# Altium PCB 400631.PcbDoc (part 2 of 8)
Units mm, origin at the board's own origin, x right, y up, seen from the top; angles counter-clockwise.
Board outline 136.53 x 63.5 mm, 4 copper layers (Top Layer, Mid-Layer 1, Mid-Layer 2, Bottom Layer), stack 1.52 mm thick; 366 components, 256 nets, 1485 pads, 1968 vias.
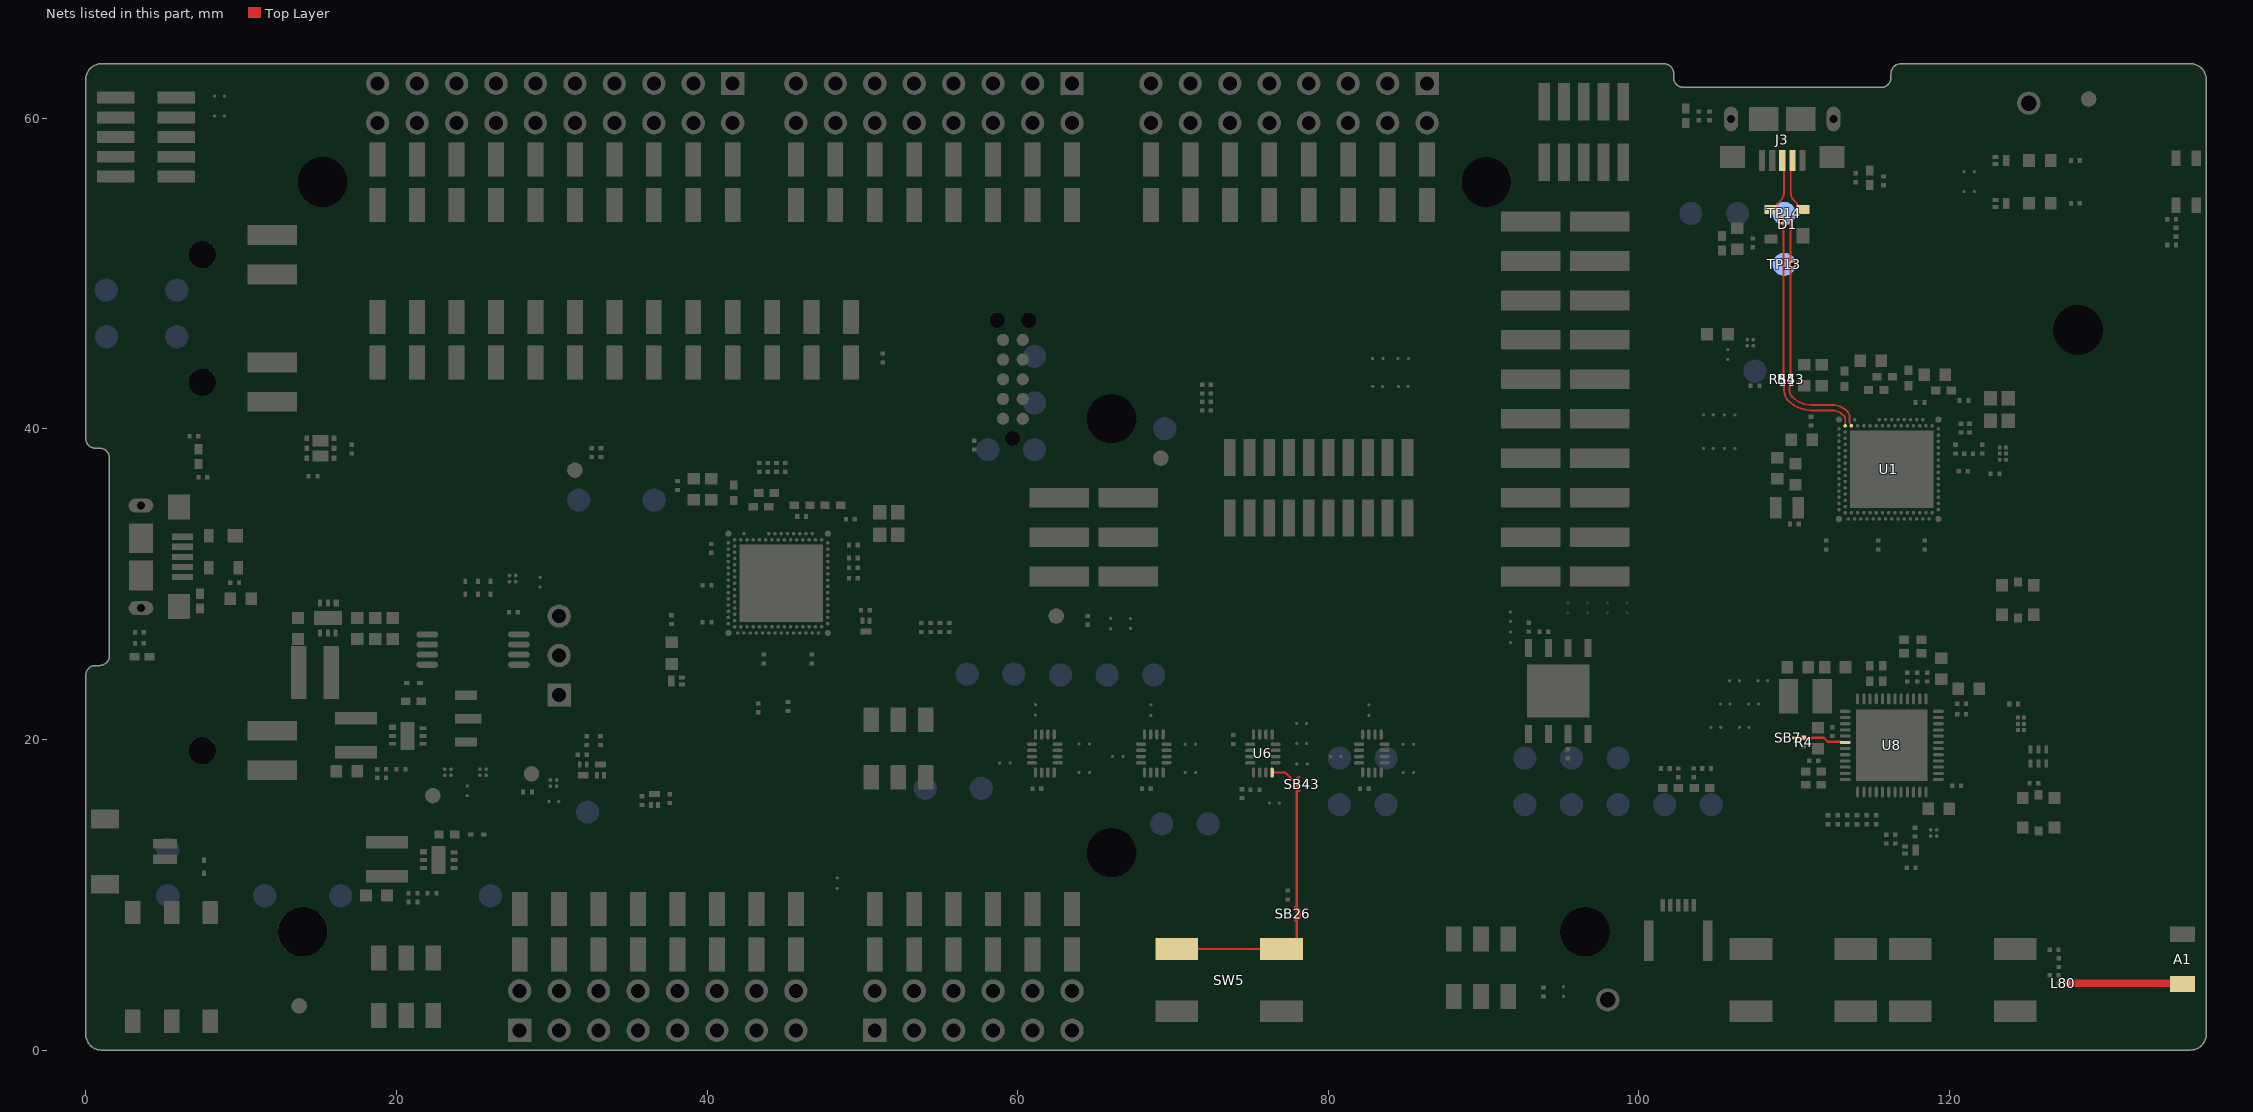
[diagram p4: the nets of this part, all layers, seen from the top]

## Footprints (in the part's own frame and the unit in brackets; to place one, negate y for a bottom-side part, rotate by r counter-clockwise, add the part's x,y. Pads: shape width x height; smd on the part's side, far side on the other; paste and mask are expansions set on the pad) (continued)
SOCKET_1x8_SMD [mm] "Socket, 2.54mm, SMD"
  rect 1.02x2.19 smd: 1(0,-1.465) 1(0,1.465) 2(2.54,-1.465) 2(2.54,1.465) 3(5.08,-1.465) 3(5.08,1.465) 4(7.62,-1.465) 4(7.62,1.465) 5(10.16,-1.465) 5(10.16,1.465) 6(12.7,1.465) 6(12.7,-1.465) 7(15.24,-1.465) 7(15.24,1.465) 8(17.78,-1.465) 8(17.78,1.465)
  silkscreen extent -1.27,-1.27 19.05,1.27, body extent -1.27,-2.29 19.05,2.29, height 7.47
SOCKET_1x10_SMD [mm] "Socket, 2.54mm, SMD"
  rect 1.02x2.19 smd: 1(0,1.465) 1(0,-1.465) 2(2.54,-1.465) 2(2.54,1.465) 3(5.08,-1.465) 3(5.08,1.465) 4(7.62,-1.465) 4(7.62,1.465) 5(10.16,-1.465) 5(10.16,1.465) 6(12.7,-1.465) 6(12.7,1.465) 7(15.24,-1.465) 7(15.24,1.465) 8(17.78,-1.465) 8(17.78,1.465) 9(20.32,-1.465) 9(20.32,1.465) 10(22.86,-1.465) 10(22.86,1.465)
  silkscreen extent -1.27,-1.27 24.13,1.27, body extent -1.27,-2.29 24.13,2.29, height 7.47
SOCKET_2x3_SMD-2.54mm-bottom-NC [mm] "Socket, 2.54mm, SMD"
  rect 1.02x2.22 smd far side: 1(-2.54,-2.825) 2(-2.54,2.825) 3(0,-2.825) 4(0,2.825) 5(2.54,-2.825) 6(2.54,2.825)
SOCKET_2x10_SMD-2.54mm [mil] "CONN HEADER VERT DUAL 20POS SMD - FEMALE HEADER, PCB, 0.1\", 10+10WAY"
  rect 50x150 smd: 1(-450,-87.5) 2(-450,87.5) 3(-350,-87.5) 4(-350,87.5) 5(-250,-87.5) 6(-250,87.5) 7(-150,-87.5) 8(-150,87.5) 9(-50,-87.5) 10(-50,87.5) 11(50,-87.5) 12(50,87.5) 13(150,-87.5) 14(150,87.5) 15(250,-87.5) 16(250,87.5) 17(350,-87.5) 18(350,87.5) 19(450,-87.5) 20(450,87.5)
  silkscreen extent -510,-140 500,100, body extent -500,-138 500,139, height 290
SODFL100X40-2N [mm] "SODFL, 2-Leads, Body 0.60x1.00mm, IPC Medium Density"
  rect 0.36x0.25 smd: 1(-0.42,0) 2(0.42,0)
  silkscreen extent -0.7,-0.35 0.5,0.5, body extent -0.5,-0.33 0.5,0.33, height 0.4
Solderbridge#1 [mm]
  round 0.2 smd paste-10: 1(-0.312,0) 2(0.312,0)
  Top Layer region: 0.077,0.432 0.152,0.505 0.271,0.467 0.335,0.424 0.409,0.351 0.462,0.292 0.521,0.193 0.549,0.099 0.544,-0.122 0.518,-0.193 0.434,-0.33 0.351,-0.411 0.259,-0.469 0.157,-0.5 0.107,-0.483 0.077,-0.43
  Top Layer region: -0.077,-0.432 -0.152,-0.505 -0.271,-0.467 -0.335,-0.424 -0.409,-0.351 -0.462,-0.292 -0.521,-0.193 -0.549,-0.099 -0.544,0.122 -0.518,0.193 -0.434,0.33 -0.351,0.411 -0.259,0.469 -0.157,0.5 -0.107,0.483 -0.077,0.43
  Top Layer lines w0.152: 0.153,0.431 cw(c0.042,0) 0.461,-0.149 cw(c0.042,0) 0.153,-0.431 ; -0.153,0.431 ccw(c-0.042,0) -0.153,-0.431
Solderbridge#2 [mm]
  round 0.2 smd paste-10: 1(-0.312,0) 2(0.312,0)
  Top Layer region: 0.077,0.432 0.152,0.505 0.271,0.467 0.335,0.424 0.409,0.351 0.462,0.292 0.521,0.193 0.549,0.099 0.544,-0.122 0.518,-0.193 0.434,-0.33 0.351,-0.411 0.259,-0.469 0.157,-0.5 0.107,-0.483 0.077,-0.43
  Top Layer region: -0.077,-0.432 -0.152,-0.505 -0.271,-0.467 -0.335,-0.424 -0.409,-0.351 -0.462,-0.292 -0.521,-0.193 -0.549,-0.099 -0.544,0.122 -0.518,0.193 -0.434,0.33 -0.351,0.411 -0.259,0.469 -0.157,0.5 -0.107,0.483 -0.077,0.43
  Top Layer lines w0.152: 0.153,0.431 cw(c0.042,0) 0.153,-0.431 ; -0.153,0.431 ccw(c-0.042,0) -0.153,-0.431
Solderbridge#3 [mm]
  round 0.2 smd paste-10: 1(-0.312,0) 2(0.312,0)
  Top Layer region: 0.077,0.432 0.152,0.505 0.271,0.467 0.335,0.424 0.409,0.351 0.462,0.292 0.521,0.193 0.549,0.099 0.544,-0.122 0.518,-0.193 0.434,-0.33 0.351,-0.411 0.259,-0.469 0.157,-0.5 0.107,-0.483 0.077,-0.43
  Top Layer region: -0.077,-0.432 -0.152,-0.505 -0.271,-0.467 -0.335,-0.424 -0.409,-0.351 -0.462,-0.292 -0.521,-0.193 -0.549,-0.099 -0.544,0.122 -0.518,0.193 -0.434,0.33 -0.351,0.411 -0.259,0.469 -0.157,0.5 -0.107,0.483 -0.077,0.43
  Top Layer lines w0.152: 0.153,-0.431 ccw(c0.042,0) 0.487,0 ccw(c0.042,0) 0.325,0.343 ccw(c0.042,0) 0.153,0.431 ; -0.153,-0.431 cw(c-0.042,0) -0.487,0 cw(c-0.042,0) -0.153,0.431
Solderbridge#4 [mm]
  round 0.2 smd paste-10: 1(-0.312,0) 2(0.312,0)
  Top Layer region: 0.077,0.432 0.152,0.505 0.271,0.467 0.335,0.424 0.409,0.351 0.462,0.292 0.521,0.193 0.549,0.099 0.544,-0.122 0.518,-0.193 0.434,-0.33 0.351,-0.411 0.259,-0.469 0.157,-0.5 0.107,-0.483 0.077,-0.43
  Top Layer region: -0.077,-0.432 -0.152,-0.505 -0.271,-0.467 -0.335,-0.424 -0.409,-0.351 -0.462,-0.292 -0.521,-0.193 -0.549,-0.099 -0.544,0.122 -0.518,0.193 -0.434,0.33 -0.351,0.411 -0.259,0.469 -0.157,0.5 -0.107,0.483 -0.077,0.43
  Top Layer lines w0.152: -0.153,-0.431 cw(c-0.042,0) -0.288,-0.371 cw(c-0.042,0) -0.312,-0.353 cw(c-0.042,0) -0.487,0 cw(c-0.042,0) -0.153,0.431 ; 0.153,-0.431 ccw(c0.042,0) 0.487,0 ccw(c0.042,0) 0.153,0.431
Solderbridge#5 [mm]
  round 0.2 smd paste-10: 1(-0.312,0) 2(0.312,0)
  Top Layer region: 0.077,0.432 0.152,0.505 0.271,0.467 0.335,0.424 0.409,0.351 0.462,0.292 0.521,0.193 0.549,0.099 0.544,-0.122 0.518,-0.193 0.434,-0.33 0.351,-0.411 0.259,-0.469 0.157,-0.5 0.107,-0.483 0.077,-0.43
  Top Layer region: -0.077,-0.432 -0.152,-0.505 -0.271,-0.467 -0.335,-0.424 -0.409,-0.351 -0.462,-0.292 -0.521,-0.193 -0.549,-0.099 -0.544,0.122 -0.518,0.193 -0.434,0.33 -0.351,0.411 -0.259,0.469 -0.157,0.5 -0.107,0.483 -0.077,0.43
  Top Layer lines w0.152: -0.153,-0.431 cw(c-0.042,0) -0.312,-0.353 cw(c-0.042,0) -0.365,-0.306 cw(c-0.042,0) -0.478,-0.087 cw(c-0.042,0) -0.48,-0.078 cw(c-0.042,0) -0.487,0 cw(c-0.042,0) -0.153,0.431 ; 0.153,-0.431 ccw(c0.042,0) 0.153,0.431
Solderbridge#6 [mm]
  round 0.2 smd paste-10: 1(-0.312,0) 2(0.312,0)
  Top Layer region: 0.077,0.432 0.152,0.505 0.271,0.467 0.335,0.424 0.409,0.351 0.462,0.292 0.521,0.193 0.549,0.099 0.544,-0.122 0.518,-0.193 0.434,-0.33 0.351,-0.411 0.259,-0.469 0.157,-0.5 0.107,-0.483 0.077,-0.43
  Top Layer region: -0.077,-0.432 -0.152,-0.505 -0.271,-0.467 -0.335,-0.424 -0.409,-0.351 -0.462,-0.292 -0.521,-0.193 -0.549,-0.099 -0.544,0.122 -0.518,0.193 -0.434,0.33 -0.351,0.411 -0.259,0.469 -0.157,0.5 -0.107,0.483 -0.077,0.43
  Top Layer lines w0.152: 0.153,0.431 cw(c0.042,0) 0.338,0.332 cw(c0.042,0) 0.338,-0.332 cw(c0.042,0) 0.312,-0.353 cw(c0.042,0) 0.153,-0.431 ; -0.153,0.431 ccw(c-0.042,0) -0.487,0 ccw(c-0.042,0) -0.486,-0.025 ccw(c-0.042,0) -0.153,-0.431
Solderbridge#7 [mm]
  round 0.2 smd paste-10: 1(-0.312,0) 2(0.312,0)
  Top Layer region: -0.077,-0.432 -0.152,-0.505 -0.271,-0.467 -0.335,-0.424 -0.409,-0.351 -0.462,-0.292 -0.521,-0.193 -0.549,-0.099 -0.544,0.122 -0.518,0.193 -0.434,0.33 -0.351,0.411 -0.259,0.469 -0.157,0.5 -0.107,0.483 -0.077,0.43
  Top Layer region: 0.077,0.432 0.152,0.505 0.271,0.467 0.335,0.424 0.409,0.351 0.462,0.292 0.521,0.193 0.549,0.099 0.544,-0.122 0.518,-0.193 0.434,-0.33 0.351,-0.411 0.259,-0.469 0.157,-0.5 0.107,-0.483 0.077,-0.43
  Top Layer lines w0.152: 0.153,0.431 cw(c0.042,0) 0.487,0 cw(c0.042,0) 0.153,-0.431 ; -0.153,0.431 ccw(c-0.042,0) -0.225,0.405 ccw(c-0.042,0) -0.312,0.353 ccw(c-0.042,0) -0.396,0.269 ccw(c-0.042,0) -0.487,0 ccw(c-0.042,0) -0.312,-0.353 ccw(c-0.042,0) -0.225,-0.405 ccw(c-0.042,0) -0.153,-0.431
Solderbridge#8 [mm]
  round 0.2 smd paste-10: 1(-0.312,0) 2(0.312,0)
  Top Layer region: 0.077,0.432 0.152,0.505 0.271,0.467 0.335,0.424 0.409,0.351 0.462,0.292 0.521,0.193 0.549,0.099 0.544,-0.122 0.518,-0.193 0.434,-0.33 0.351,-0.411 0.259,-0.469 0.157,-0.5 0.107,-0.483 0.077,-0.43
  Top Layer region: -0.077,-0.432 -0.152,-0.505 -0.271,-0.467 -0.335,-0.424 -0.409,-0.351 -0.462,-0.292 -0.521,-0.193 -0.549,-0.099 -0.544,0.122 -0.518,0.193 -0.434,0.33 -0.351,0.411 -0.259,0.469 -0.157,0.5 -0.107,0.483 -0.077,0.43
  Top Layer lines w0.152: 0.153,0.431 cw(c0.042,0) 0.486,-0.036 cw(c0.042,0) 0.312,-0.353 cw(c0.042,0) 0.153,-0.431 ; -0.153,0.431 ccw(c-0.042,0) -0.2,0.416 ccw(c-0.042,0) -0.307,0.357 ccw(c-0.042,0) -0.312,0.353 ccw(c-0.042,0) -0.461,0.149 ccw(c-0.042,0) -0.487,0 ccw(c-0.042,0) -0.312,-0.353 ccw(c-0.042,0) -0.3,-0.362 ccw(c-0.042,0) -0.274,-0.38 ccw(c-0.042,0) -0.2,-0.416 ccw(c-0.042,0) -0.153,-0.431
Solderbridge#9 [mm]
  round 0.2 smd paste-10: 1(-0.312,0) 2(0.312,0)
  Top Layer region: -0.077,-0.432 -0.152,-0.505 -0.271,-0.467 -0.335,-0.424 -0.409,-0.351 -0.462,-0.292 -0.521,-0.193 -0.549,-0.099 -0.544,0.122 -0.518,0.193 -0.434,0.33 -0.351,0.411 -0.259,0.469 -0.157,0.5 -0.107,0.483 -0.077,0.43
  Top Layer region: 0.077,0.432 0.152,0.505 0.271,0.467 0.335,0.424 0.409,0.351 0.462,0.292 0.521,0.193 0.549,0.099 0.544,-0.122 0.518,-0.193 0.434,-0.33 0.351,-0.411 0.259,-0.469 0.157,-0.5 0.107,-0.483 0.077,-0.43
  Top Layer lines w0.152: 0.153,0.431 cw(c0.042,0) 0.487,0 cw(c0.042,0) 0.461,-0.149 cw(c0.042,0) 0.153,-0.431 ; -0.153,0.431 ccw(c-0.042,0) -0.277,0.377 ccw(c-0.042,0) -0.312,0.353 ccw(c-0.042,0) -0.487,0 ccw(c-0.042,0) -0.312,-0.353 ccw(c-0.042,0) -0.153,-0.431
Solderbridge#10 [mm]
  round 0.2 smd paste-10: 1(-0.312,0) 2(0.312,0)
  Top Layer region: 0.077,0.432 0.152,0.505 0.271,0.467 0.335,0.424 0.409,0.351 0.462,0.292 0.521,0.193 0.549,0.099 0.544,-0.122 0.518,-0.193 0.434,-0.33 0.351,-0.411 0.259,-0.469 0.157,-0.5 0.107,-0.483 0.077,-0.43
  Top Layer region: -0.077,-0.432 -0.152,-0.505 -0.271,-0.467 -0.335,-0.424 -0.409,-0.351 -0.462,-0.292 -0.521,-0.193 -0.549,-0.099 -0.544,0.122 -0.518,0.193 -0.434,0.33 -0.351,0.411 -0.259,0.469 -0.157,0.5 -0.107,0.483 -0.077,0.43
  Top Layer lines w0.152: 0.153,0.431 cw(c0.042,0) 0.153,-0.431 ; -0.153,0.431 ccw(c-0.042,0) -0.461,0.149 ccw(c-0.042,0) -0.203,-0.414 ccw(c-0.042,0) -0.153,-0.431
Solderbridge#11 [mm]
  round 0.2 smd paste-10: 1(-0.312,0) 2(0.312,0)
  Top Layer region: 0.077,0.432 0.152,0.505 0.271,0.467 0.335,0.424 0.409,0.351 0.462,0.292 0.521,0.193 0.549,0.099 0.544,-0.122 0.518,-0.193 0.434,-0.33 0.351,-0.411 0.259,-0.469 0.157,-0.5 0.107,-0.483 0.077,-0.43
  Top Layer region: -0.077,-0.432 -0.152,-0.505 -0.271,-0.467 -0.335,-0.424 -0.409,-0.351 -0.462,-0.292 -0.521,-0.193 -0.549,-0.099 -0.544,0.122 -0.518,0.193 -0.434,0.33 -0.351,0.411 -0.259,0.469 -0.157,0.5 -0.107,0.483 -0.077,0.43
  Top Layer lines w0.152: -0.153,0.431 ccw(c-0.042,0) -0.487,0 ccw(c-0.042,0) -0.312,-0.353 ccw(c-0.042,0) -0.153,-0.431 ; 0.153,0.431 cw(c0.042,0) 0.457,0.16 cw(c0.042,0) 0.487,-0.015 cw(c0.042,0) 0.486,-0.025 cw(c0.042,0) 0.457,-0.16 cw(c0.042,0) 0.407,-0.254 cw(c0.042,0) 0.33,-0.339 cw(c0.042,0) 0.153,-0.431
Solderbridge_Shorted#1 [mm]
  round 0.2 smd paste-10: 1(-0.338,0) 2(0.338,0)
  Top Layer region: -0.102,-0.432 -0.178,-0.505 -0.296,-0.467 -0.361,-0.424 -0.434,-0.351 -0.488,-0.292 -0.546,-0.193 -0.574,-0.099 -0.569,0.122 -0.544,0.193 -0.46,0.33 -0.376,0.411 -0.284,0.469 -0.183,0.5 -0.132,0.483 -0.102,0.43
  Top Layer region: 0.102,0.432 0.178,0.505 0.296,0.467 0.361,0.424 0.434,0.351 0.488,0.292 0.546,0.193 0.574,0.099 0.569,-0.122 0.544,-0.193 0.46,-0.33 0.376,-0.411 0.284,-0.469 0.183,-0.5 0.132,-0.483 0.102,-0.43
  Top Layer lines w0.152: 0.178,0.431 cw(c0.068,0) 0.178,-0.431 ; -0.178,0.431 ccw(c-0.068,0) -0.178,-0.431
  Top Layer lines w0.203: 0.338,0 -0.338,0
Solderbridge_Shorted#2 [mm]
  round 0.2 smd paste-10: 1(-0.338,0) 2(0.338,0)
  Top Layer region: 0.102,0.432 0.178,0.505 0.296,0.467 0.361,0.424 0.434,0.351 0.488,0.292 0.546,0.193 0.574,0.099 0.569,-0.122 0.544,-0.193 0.46,-0.33 0.376,-0.411 0.284,-0.469 0.183,-0.5 0.132,-0.483 0.102,-0.43
  Top Layer region: -0.102,-0.432 -0.178,-0.505 -0.296,-0.467 -0.361,-0.424 -0.434,-0.351 -0.488,-0.292 -0.546,-0.193 -0.574,-0.099 -0.569,0.122 -0.544,0.193 -0.46,0.33 -0.376,0.411 -0.284,0.469 -0.183,0.5 -0.132,0.483 -0.102,0.43
  Top Layer lines w0.152: 0.178,0.431 cw(c0.068,0) 0.512,0 cw(c0.068,0) 0.512,-0.005 cw(c0.068,0) 0.503,-0.092 cw(c0.068,0) 0.178,-0.431 ; -0.178,0.431 ccw(c-0.068,0) -0.178,-0.431
  Top Layer lines w0.203: 0.338,0 -0.338,0
Solderbridge_Shorted#3 [mm]
  round 0.2 smd paste-10: 1(-0.338,0) 2(0.338,0)
  Top Layer region: 0.102,0.432 0.178,0.505 0.296,0.467 0.361,0.424 0.434,0.351 0.488,0.292 0.546,0.193 0.574,0.099 0.569,-0.122 0.544,-0.193 0.46,-0.33 0.376,-0.411 0.284,-0.469 0.183,-0.5 0.132,-0.483 0.102,-0.43
  Top Layer region: -0.102,-0.432 -0.178,-0.505 -0.296,-0.467 -0.361,-0.424 -0.434,-0.351 -0.488,-0.292 -0.546,-0.193 -0.574,-0.099 -0.569,0.122 -0.544,0.193 -0.46,0.33 -0.376,0.411 -0.284,0.469 -0.183,0.5 -0.132,0.483 -0.102,0.43
  Top Layer lines w0.152: 0.178,0.431 cw(c0.068,0) 0.512,-0.006 cw(c0.068,0) 0.487,-0.149 cw(c0.068,0) 0.178,-0.431 ; -0.178,0.431 ccw(c-0.068,0) -0.178,-0.431
  Top Layer lines w0.203: 0.338,0 -0.338,0
Solderbridge_Shorted#4 [mm]
  round 0.2 smd paste-10: 1(-0.338,0) 2(0.338,0)
  Top Layer region: 0.102,0.432 0.178,0.505 0.296,0.467 0.361,0.424 0.434,0.351 0.488,0.292 0.546,0.193 0.574,0.099 0.569,-0.122 0.544,-0.193 0.46,-0.33 0.376,-0.411 0.284,-0.469 0.183,-0.5 0.132,-0.483 0.102,-0.43
  Top Layer region: -0.102,-0.432 -0.178,-0.505 -0.296,-0.467 -0.361,-0.424 -0.434,-0.351 -0.488,-0.292 -0.546,-0.193 -0.574,-0.099 -0.569,0.122 -0.544,0.193 -0.46,0.33 -0.376,0.411 -0.284,0.469 -0.183,0.5 -0.132,0.483 -0.102,0.43
  Top Layer lines w0.152: -0.178,-0.431 cw(c-0.068,0) -0.178,0.431 ; 0.178,-0.431 ccw(c0.068,0) 0.512,0 ccw(c0.068,0) 0.178,0.431
  Top Layer lines w0.203: -0.338,0 0.338,0
SON127P600X80_HS-9N [mm] "SON, 8-Leads, Body 5.00x6.00mm, Pitch 1.27mm, Thermal Pad 4.00x3.40mm, IPC Medium Density"
  rect 1.15x0.45 smd: 1(-2.77,1.905) 2(-2.77,0.635) 3(-2.77,-0.635) 4(-2.77,-1.905) 5(2.77,-1.905) 6(2.77,-0.635) 7(2.77,0.635) 8(2.77,1.905)
  rect 3.4x4 smd paste-1.7: 9(0,0)
  silkscreen extent -3.97,-2.6 3.1,2.67, body extent -3.05,-2.55 3.05,2.55, height 0.8
SOT89-150P409X160-3N [mm] "SOT89, 3-Leads, Body 4.50x2.45mm, Pitch 1.50mm, Lead Span 4.1mm, IPC Medium Density"
  rect 1.4x0.6 smd: 1(-1.8,1.5) 3(-1.8,-1.5)
  rect 1.7x0.6 smd: 2(-1.65,0)
  Top Layer region: -1.016,-0.3 -0.635,-0.3 -0.635,0.3 -1.016,0.3
  Top Layer region: -0.8,0.3 -0.15,0.95 1.85,0.95 2.5,0.3 2.5,-0.3 1.85,-0.95 -0.15,-0.95 -0.8,-0.3
  silkscreen extent -2.05,-2.3 1.32,2.47, body extent -2.2,-2.3 1.93,2.3, height 1.6
SOT190P230X110-4L [mm] "SOT143, 4-Leads, Body 3.0x2.5mm (max), Pitch 1.90mm, IPC High Density"
  rect 0.85x1 smd: 1(-1.025,0.75)
  rect 0.85x0.6 smd: 2(-1.025,-0.95) 3(1.025,-0.95) 4(1.025,0.95)
  silkscreen extent -1.15,-1.5 0.7,1.92, body extent -1.21,-1.46 1.21,1.46, height 1
Switch-PB-6.2x6.3mm-SMD [mm] "6.2×6.5mm TACT Switch, without ground connector"
  rect 2.75x1.4 smd: 1(-3.375,2) 1(3.375,2) 2(-3.375,-2) 2(3.375,-2)
  silkscreen extent -3,-3 3,3, body extent -3.6,-3.1 3.6,3.1, height 2.5
TC2050-IDC-NLFP [mil]
  round 39 hole 39 unplated mask+3: 0(-150,0) 0(150,-40) 0(150,40)
  round 31 smd paste-196.85: 1(-100,-25) 2(-50,-25) 3(0,-25) 4(50,-25) 5(100,-25) 6(100,25) 7(50,25) 8(0,25) 9(-50,25) 10(-100,25)
  Top Layer pour cut-out: -100,25 -100,-25 100,-25 100,25
TESTPAD-TH [mm]
  round 1.5 hole 1: 1(0,0)
  silkscreen extent -1,-1 1,1
TP_SMD_D1.0mm [mm] "Test point - pad 1.0mm"
  round 1 smd paste-5: 1(0,0)
  silkscreen extent -0.76,-0.76 0.76,0.76
TP_SMD_D1.5mm [mm] "Test point - pad 1.5mm"
  round 1.5 smd paste-5: 1(0,0)
  body extent -0.75,-0.75 0.75,0.75, height 0.05
TSNP-6-8 [mm] "LGA, 6-Leads, Body 0,70x1,10mmx0,38mm, Pitch 0,40mm"
  rect 0.25x0.25 smd paste-0.03 mask+0.08: 1(-0.2,0.4) 2(-0.2,0) 3(-0.2,-0.4) 4(0.2,-0.4) 5(0.2,0) 6(0.2,0.4)
  silkscreen extent -0.6,-0.8 0.6,0.8, body extent -0.38,-0.58 0.38,0.58, height 0.38
TSOP65P640X120-8N [mm] "TSOP, 8-Leads, Body 3.00x4.40mm, Pitch 0.65mm, IPC Medium Density"
  oval 1.4x0.4 smd: 1(-2.95,0.975) 2(-2.95,0.325) 3(-2.95,-0.325) 4(-2.95,-0.975) 5(2.95,-0.975) 6(2.95,-0.325) 7(2.95,0.325) 8(2.95,0.975)
  silkscreen extent -3.07,-1.55 1.85,1.87, body extent -3.2,-1.55 3.2,1.55, height 1.2
TY-NR3015 [mm] "Molded Inductor, 2-Leads, Body 3.00x3.00mm, IPC Medium Density"
  rect 0.8x2.7 smd: 1(-1.1,0) 2(1.1,0)
  silkscreen extent -2.05,-1.55 1.55,1.75, body extent -1.5,-1.5 1.5,1.5, height 1.35
USB-Micro-B-RA-SMD-PiP [mm] "Micro USB B SMT"
  rect 1.35x0.4 smd mask+0.075: 1(0,1.3) 2(0,0.65) 3(0,0) 4(0,-0.65) 5(0,-1.3)
  oval 1.6x0.9 hole 0.5 slot 1.2 at 0 deg: 6(-2.675,-3.3) 6(-2.675,3.3)
  oval 2x1.5 on Top Paste: 6(-2.675,-3.3) 6(-2.675,3.3)
  rect 1.55x1.9 smd: 6(-2.675,-1.2) 6(-2.675,1.2)
  rect 1.4x1.6 smd: 6(-0.225,-3.2) 6(-0.225,3.2)
  silkscreen extent -4.75,-3.75 0.25,3.75, body extent -5.28,-4.1 0.15,4.1, height 2.72
USP-6C [mm] "DFN, 6-Leads, Body 2.00x1.80mm, Pitch 0.50mm, Thermal Pad 1.00x1.40mm, IPC Medium Density"
  rect 0.45x0.35 smd paste-0.05 mask+0.075: 1(-0.975,0.55)
  rect 0.45x0.25 smd paste-0.05 mask+0.075: 2(-0.975,0) 3(-0.975,-0.5) 4(0.975,-0.5) 5(0.975,0) 6(0.975,0.5)
  rect 0.9x1.8 smd paste-2: 7(0,0)
  Top Layer region: -0.5,-0.8 0.5,-0.8 0.5,0.8 -0.5,0.8
  silkscreen extent -1.42,-1.07 0.97,1.12, body extent -0.93,-1.02 0.93,1.02, height 0.6
VLS3012HBX [mm] "4.7µH Shielded Wirewound Inductor 2.23A 201 mOhm Max Nonstandard"
  rect 1x3.4 smd: 1(-1.05,0) 2(1.05,0)
  silkscreen extent -0.37,-1.55 0.38,1.55, body extent -1.53,-1.51 1.53,1.51, height 1.2
XQFN40P180X260X50-16N [mm] "QFN, 16-Leads, Body 1.80x2.60mm, Pitch 0.40mm, IPC Medium Density"
  oval 0.65x0.22 smd paste-0.02 mask+0.04: 1(-0.825,0.6) 2(-0.825,0.2) 3(-0.825,-0.2) 4(-0.825,-0.6) 9(0.825,-0.6) 10(0.825,-0.2) 11(0.825,0.2) 12(0.825,0.6)
  oval 0.22x0.65 smd paste-0.02 mask+0.04: 5(-0.6,-1.225) 6(-0.2,-1.225) 7(0.2,-1.225) 8(0.6,-1.225) 13(0.6,1.225) 14(0.2,1.225) 15(-0.2,1.225) 16(-0.6,1.225)
  silkscreen extent -1.45,-1.4 1,1.4, body extent -0.91,-1.31 0.91,1.31, height 0.55
XTAL_2012 [mm] "XTAL SMD 2.0 x 1.2 mm"
  rect 0.75x1.4 smd: 1(-0.725,0) 2(0.725,0)
  silkscreen extent -0.24,-0.6 0.24,0.6, body extent -1,-0.61 1,0.61, height 0.6

## Part data
A1: "2.4, 5, and 6GHz BT/WiFi6E Mini Antenna, Single-feed, Tri-band, Corner Mount", Manufacturer="Johanson Technology", Part number IPS=N.A., Part number NEMS=100700074, Supplier Part Number 1=712-2450AD18A6050ETR-ND, Artikkelnr Noca=N.A., Author=hany, Component Class=Antennas, Component Status=Active, ComponentLink1Description=Datasheet, ComponentLink1URL=https://www.johansontechnology.com/datasheets/2450AD18A6050/2450AD18A6050.pdf, ComponentLink2Description="Supplier link", ComponentLink2URL=N.A., Footprint Doc=2450AD18A6050, HelpURL=N.A., LatestRevisionDate=2022-01-21, Manufacturer Part Number=2450AD18A6050, Note=N.A., Pad Count=2, Part Number=2450AD18A6050, Part number Norautron=N.A., PartId=100700074, Published=2022-01-21, Supplier 1=Digi-Key, Supplier 2=Mouser, Supplier Part Number 2=609-2450AD18A6050
A2: library part "Johanson 2450AT18D0100_STD-R", "2.45 GHz chip antenna", Manufacturer="Johanson Technology", Part number IPS=00000001415, Part number NEMS=100700005, Part number Norautron=N.A., Supplier Part Number 1=2450AT18D0100E, Artikkelnr Noca=53059035, Author=rsk, Component Class=Antennas, Component Status=Active, ComponentLink1Description=Datasheet, ComponentLink1URL=N.A., ComponentLink2Description="Supplier link", ComponentLink2URL=N.A., Footprint Doc=2450AT18D0100, HelpURL=http://www.johansontechnology.com/datasheets/antennas/2450AT18D0100.pdf, LatestRevisionDate=2016-06-02, Manufacturer Part Number=2450AT18D0100, Note=N.A., Pad Count=4, Part Number="Johanson 2450AT18D0100_STD-R", PartId=100700005, Published=2016-01-12, Supplier 1=Digi-Key, Supplier 2=Mouser, Supplier Part Number 2=609-2450AT18D0100E
C1: library part C0201-0.7p-HQ-Murata, "Capacitor, Ceramic, NP0, ±0.1pF, 25V", Manufacturer=Murata, Manufacturer Part Number=GJM0335C1ER70BB01D, Part number IPS=N.A., Part number NEMS=100200441, Part number Norautron=26470001, Supplier Part Number 1=490-8076-1-ND, Artikkelnr Noca=N.A., Author=rsk, Component Class=Capacitors, Component Status=Active, ComponentLink1Description=Datasheet, ComponentLink1URL=https://search.murata.co.jp/Ceramy/image/img/A01X/G101/ENG/GJM0335C1ER70BB01-01.pdf, ComponentLink2Description="Supplier link", ComponentLink2URL=https://www.murata.com/en-eu/products/productdetail?partno=GJM0335C1ER70BB01%23, Footprint Doc=0201, HelpURL=https://www.digikey.no/product-detail/en/murata-electronics/GJM0335C1ER70BB01D/490-8076-1-ND/4380362, LatestRevisionDate=2020-10-13, Note=25V, Pad Count=2, Part Number=C0201-0.7p-HQ-Murata, PartId=100200441, Published=2020-03-05, Supplier 1=Digi-Key, Supplier 2=N.A., Supplier Part Number 2=N.A.
C2 C3 C5 C7 C16 C25 C26 C38 C39 C74: library part C0402-1µ0-6.3V-X5R-5%, "Capacitor, X5R, ±5%, 6.3V", Manufacturer=N.A., Part number IPS="00000007786, 00000003457", Part number NEMS=100200190, Supplier Part Number 1=1276-1444-1-ND, Artikkelnr Noca=20039235, Author=rsk, Component Class=Capacitors, Component Status=Active, ComponentLink1Description=Datasheet, ComponentLink1URL=N.A., ComponentLink2Description="Supplier link", ComponentLink2URL=N.A., Footprint Doc=0402, HelpURL=N.A., LatestRevisionDate=2021-07-22, Manufacturer Part Number=N.A., Note=6.3V, Pad Count=2, Part Number=C0402-1µ0-6.3V-X5R-5%, Part number Norautron=N.A., PartId=100200190, Published=2009-05-08, Supplier 1=Digi-Key, Supplier 2=N.A., Supplier Part Number 2=N.A.
C4 C27: library part C0201-2n2, "Capacitor, X7R, ±10%, 10V", Manufacturer=N.A., Part number IPS=00000001778, Part number NEMS=100200060, Part number Norautron=26470002, Artikkelnr Noca=N.A., Author=rsk, Component Class=Capacitors, Component Status=Active, ComponentLink1Description=Datasheet, ComponentLink1URL=N.A., ComponentLink2Description="Supplier link", ComponentLink2URL=N.A., Footprint Doc=0201, HelpURL=N.A., LatestRevisionDate=2014-11-13, Manufacturer Part Number=N.A., Note=10V, Pad Count=2, Part Number=C0201-2n2, PartId=100200060, Published=2014-11-13, Supplier 1=N.A., Supplier 2=N.A., Supplier Part Number 1=N.A., Supplier Part Number 2=N.A.
C6 C8 C9 C10 C11 C12 C13 C14 C15 C24 C30 C31 C32 C33 C34 C35 C36 C37 C41 C42 C45 C48 C50 C52 C54 C55 C56 C65 C73 C92: library part C0201-100n, "Capacitor, X5R, ±10%", Manufacturer=N.A., Part number IPS="00000001248, 00000002505", Part number NEMS=100200078, Part number Norautron=262071862, Artikkelnr Noca=N.A., Author=rsk, Component Class=Capacitors, Component Status=Active, ComponentLink1Description=Datasheet, ComponentLink1URL=N.A., ComponentLink2Description="Supplier link", ComponentLink2URL=N.A., Footprint Doc=0201, HelpURL=N.A., LatestRevisionDate=2017-11-09, Manufacturer Part Number=N.A., Note=16V, Pad Count=2, Part Number=C0201-100n, PartId=100200078, Published=2014-11-13, Supplier 1=N.A., Supplier 2=N.A., Supplier Part Number 1=N.A., Supplier Part Number 2=N.A.
C17 C18 C20 C40: library part C0603-4µ7-10V-X7S, "Capacitor, X7S, ±10%, 10V", Manufacturer=N.A., Part number IPS=00000001779, Part number NEMS=100200351, Supplier Part Number 1=445-14258-1-ND, Artikkelnr Noca=20030013, Author=rsk, Component Class=Capacitors, Component Status=Active, ComponentLink1Description=Datasheet, ComponentLink1URL=N.A., ComponentLink2Description="Supplier link", ComponentLink2URL=N.A., Footprint Doc=0603, HelpURL=N.A., LatestRevisionDate=2016-08-15, Manufacturer Part Number=N.A., Note=10V, Pad Count=2, Part Number=C0603-4µ7-10V-X7S, Part number Norautron=N.A., PartId=100200351, Published=2016-08-15, Supplier 1=Digi-Key, Supplier 2=N.A., Supplier Part Number 2=N.A.
C19: library part C0603-2µ2-6.3V-X7R, "Capacitor, X7R, ±10%", Manufacturer=N.A., Part number NEMS=100200272, Artikkelnr Noca=20039322, Author=rsk, Component Class=Capacitors, Component Status=Active, ComponentLink1Description=Datasheet, ComponentLink1URL=N.A., ComponentLink2Description="Supplier link", ComponentLink2URL=N.A., Footprint Doc=0603, HelpURL=N.A., LatestRevisionDate=2021-07-22, Manufacturer Part Number=N.A., Note=6.3V, Pad Count=2, Part Number=C0603-2µ2-6.3V-X7R, Part number IPS=N.A., Part number Norautron=N.A., PartId=100200272, Published=2009-05-08, Supplier 1=N.A., Supplier 2=N.A., Supplier Part Number 1=N.A., Supplier Part Number 2=N.A.
C21 C23 C28 C29 C46 C89 C90 C94: library part C0201-N.C., "Not mounted", Manufacturer=N.A., Part number NEMS=100200001, Artikkelnr Noca=N.A., Assembly="Not mounted", Author=rsk, Component Class=Capacitors, Component Status=Active, ComponentLink1Description=Datasheet, ComponentLink1URL=N.A., ComponentLink2Description="Supplier link", ComponentLink2URL=N.A., Footprint Doc=0201, HelpURL=N.A., LatestRevisionDate=2014-11-13, Manufacturer Part Number=N.A., Note="Chip Cap", Pad Count=2, Part Number=C0201-N.C., Part number IPS=N.A., Part number Norautron=N.A., PartId=100200001, Published=2014-11-13, Supplier 1=N.A., Supplier 2=N.A., Supplier Part Number 1=N.A., Supplier Part Number 2=N.A.
C22 C47 C49: library part C0201-10n, "Capacitor, X7R, ±10%", Manufacturer=N.A., Part number IPS=00000003480, Part number NEMS=100200067, Part number Norautron=26621779, Artikkelnr Noca=N.A., Author=rsk, Component Class=Capacitors, Component Status=Active, ComponentLink1Description=Datasheet, ComponentLink1URL=N.A., ComponentLink2Description="Supplier link", ComponentLink2URL=N.A., Footprint Doc=0201, HelpURL=N.A., LatestRevisionDate=2017-11-09, Manufacturer Part Number=N.A., Note=10V, Pad Count=2, Part Number=C0201-10n, PartId=100200067, Published=2014-11-13, Supplier 1=N.A., Supplier 2=N.A., Supplier Part Number 1=N.A., Supplier Part Number 2=N.A.
C43 C44: library part C0402-300p, "Capacitor, C0G, ±5%, 50V", Manufacturer=N.A., Part number IPS=00000007788, Part number NEMS=100200155, Supplier Part Number 1=490-3234-1-ND, Artikkelnr Noca=20020004, Author=rsk, Component Class=Capacitors, Component Status=Active, ComponentLink1Description=Datasheet, ComponentLink1URL=N.A., ComponentLink2Description="Supplier link", ComponentLink2URL=N.A., Footprint Doc=0402, HelpURL=N.A., LatestRevisionDate=2020-10-13, Manufacturer Part Number=N.A., Note=50V, Pad Count=2, Part Number=C0402-300p, Part number Norautron=N.A., PartId=100200155, Published=2015-05-29, Supplier 1=Digi-Key, Supplier 2=N.A., Supplier Part Number 2=N.A.
C51 C53 C67: library part C0603-1µ0, "Capacitor, X7R, ±10%", Manufacturer=N.A., Part number IPS=00000000616, Part number NEMS=100200271, Part number Norautron=262083409, Artikkelnr Noca=20039282, Author=rsk, Component Class=Capacitors, Component Status=Active, ComponentLink1Description=Datasheet, ComponentLink1URL=N.A., ComponentLink2Description="Supplier link", ComponentLink2URL=N.A., Footprint Doc=0603, HelpURL=N.A., LatestRevisionDate=2013-06-05, Manufacturer Part Number=N.A., Note=16V, Pad Count=2, Part Number=C0603-1µ0, PartId=100200271, Published=2009-05-08, Supplier 1=N.A., Supplier 2=N.A., Supplier Part Number 1=N.A., Supplier Part Number 2=N.A.
C57 C59 C60 C93: library part C0603-10µ-25V-X5R-CL10A106MA8NRNC, "Capacitor, X5R, ±20%, 25V", Manufacturer="Samsung Electro-Mechanics America", Manufacturer Part Number=CL10A106MA8NRNC, Part number IPS=00000009948, Part number NEMS=100200354, Part number Norautron=N.A., Supplier Part Number 1=1276-1869-1-ND, Artikkelnr Noca=20039436, Author=rsk, Component Class=Capacitors, Component Status=Active, ComponentLink1Description=Datasheet, ComponentLink1URL=N.A., ComponentLink2Description="Supplier link", ComponentLink2URL=N.A., Footprint Doc=0603, HelpURL=http://www.samsungsem.com/kr/front/downloadcms.do?path=/kr/support/product-search/mlcc/__icsFiles/afieldfile/2014/11/05&fileName=S_CL10A106MA8NRNC.pdf, LatestRevisionDate=2021-07-21, Note=25V, Pad Count=2, Part Number=C0603-10µ-25V-X5R-CL10A106MA8NRNC, PartId=100200354, Published=2015-04-10, Supplier 1=Digi-Key, Supplier 2=N.A., Supplier Part Number 2=N.A.
C58: library part C0402-1µ0-16V-X6S-GRM155C81C105KE11, "Capacitor, Ceramic, 1.0µF 16V X6S 0402,±10%", Manufacturer=Murata, Manufacturer Part Number=GRM155C81C105KE11, Part number IPS=N.A., Part number NEMS=100200493, Supplier Part Number 1=81-GRM155C81C105KE1J, Artikkelnr Noca=N.A., Author=prbu, Component Class=Capacitors, Component Status=Active, ComponentLink1Description=Datasheet, ComponentLink1URL=https://www.murata.com/en-sg/products/productdetail?partno=GRM155C81C105KE11%23, ComponentLink2Description="Supplier link", ComponentLink2URL=https://www.mouser.com/ProductDetail/Murata-Electronics/GRM155C81C105KE11J?qs=qSfuJ%252Bfl%2Fd5QDM5fFpbyoA%3D%3D, Footprint Doc=0402, HelpURL=N.A., LatestRevisionDate=2021-12-09, Note=16V, Pad Count=2, Part Number=C0402-1µ0-16V-X6S-GRM155C81C105KE11, Part number Norautron=N.A., PartId=100200493, Published=2021-12-09, Supplier 1=Mouser, Supplier 2=Digi-Key, Supplier Part Number 2=490-GRM155C81C105KE11JCT-ND
C61 C66: library part C0402-4µ7-10V-X5R, "Capacitor, X5R, 10V", Manufacturer=Murata, Manufacturer Part Number=GRM155R61A475MEAAD, Part number IPS=N.A., Part number NEMS=100200415, Supplier Part Number 1=490-14306-1-ND, Artikkelnr Noca=N.A., Author=rsk, Component Class=Capacitors, Component Status=Active, ComponentLink1Description=Datasheet, ComponentLink1URL=http://search.murata.co.jp/Ceramy/image/img/A01X/G101/ENG/GRM155R61A475MEAA-01.pdf, ComponentLink2Description="Supplier link", ComponentLink2URL=https://www.digikey.com/product-detail/en/murata-electronics-north-america/GRM155R61A475MEAAD/490-14306-1-ND/6234742, Footprint Doc=0402, HelpURL=https://psearch.en.murata.com/capacitor/product/GRM155R61A475MEAA%23.html, LatestRevisionDate=2020-10-13, Note=10V, Pad Count=2, Part Number=C0402-4µ7-10V-X5R, Part number Norautron=N.A., PartId=100200415, Published=2018-10-04, Supplier 1=Digi-Key, Supplier 2=N.A., Supplier Part Number 2=N.A.
C62 C69: library part C0201-150p-25V-COG-GRM0335C1E151JA01D, "Capacitor, Ceramic, NP0, ±5%, 25V", Manufacturer=Murata, Manufacturer Part Number=GRM0335C1E151JA01D, Part number IPS=00000004306, Part number NEMS=100200444, Part number Norautron=N.A., Supplier Part Number 1=81-GRM0335C1E151JA1D, Artikkelnr Noca=N.A., Author=getr, Component Class=Capacitors, Component Status=Active, ComponentLink1Description=Datasheet, ComponentLink1URL=https://www.mouser.com/datasheet/2/281/murata_03052018_GRM_Series_1-1310166.pdf, ComponentLink2Description="Supplier link", ComponentLink2URL=https://www.mouser.com/ProductDetail/Murata-Electronics/GRM0335C1E151JA01D?qs=%2Fha2pyFaduiNjPL6xbzKSo%252BchgTMqklsGrBRdYVX326W%252BRpjq1WqAQZ5mC%252Bu6szW, Footprint Doc=0201, HelpURL=N.A., LatestRevisionDate=2020-10-13, Note="Chip Cap 5%", Pad Count=2, Part Number=C0201-150p-25V-COG-GRM0335C1E151JA01D, PartId=100200444, Published=2020-03-17, Supplier 1=Mouser, Supplier 2=Mouser, Supplier Part Number 2=490-GRM0335C1E151JA01DTR-ND
C63 C70: library part C0603-10µ-25V-X5R-GRM188R61E106MA73J, "Capacitor, Ceramic, X5R, ±20%, 25V", Manufacturer=Murata, Manufacturer Part Number=GRM188R61E106MA73J, Part number IPS=N.A., Part number NEMS=100200456, Supplier Part Number 1=490-12737-1-ND, Artikkelnr Noca=N.A., Author=rsk, Component Class=Capacitors, Component Status=Active, ComponentLink1Description=Datasheet, ComponentLink1URL=https://search.murata.co.jp/Ceramy/image/img/A01X/G101/ENG/GRM188R61E106MA73-01.pdf, ComponentLink2Description="Supplier link", ComponentLink2URL=https://www.murata.com/en-global/products/productdetail?partno=GRM188R61E106MA73%23, Footprint Doc=0603, HelpURL=N.A., LatestRevisionDate=2021-07-22, Note=25V, Pad Count=2, Part Number=C0603-10µ-25V-X5R-GRM188R61E106MA73J, Part number Norautron=N.A., PartId=100200456, Published=2020-12-16, Supplier 1=Digi-Key, Supplier 2=Mouser, Supplier Part Number 2=81-GRM188R61E106MA3J
C64: library part C0402-2µ2-25V-X5R-GRM155R61E225KE11, "Capacitor, Ceramic, 2.2µF 25V X5R 0201,±10%", Manufacturer=Murata, Manufacturer Part Number=GRM155R61E225KE11, Part number IPS=N.A., Part number NEMS=100200492, Supplier Part Number 1=81-GRM155R61E225KE1D, Artikkelnr Noca=N.A., Author=prbu, Component Class=Capacitors, Component Status=Active, ComponentLink1Description=Datasheet, ComponentLink1URL=https://www.murata.com/en-sg/products/productdetail?partno=GRM155R61E225KE11%23, ComponentLink2Description="Supplier link", ComponentLink2URL=https://www.mouser.com/ProductDetail/Murata-Electronics/GRM155R61E225KE11D?qs=eeBpzGFlv%252B8X58bIUndZvA%3D%3D, Footprint Doc=0402, HelpURL=N.A., LatestRevisionDate=2021-12-09, Note=25V, Pad Count=2, Part Number=C0402-2µ2-25V-X5R-GRM155R61E225KE11, Part number Norautron=N.A., PartId=100200492, Published=2021-12-09, Supplier 1=Mouser, Supplier 2=Digi-Key, Supplier Part Number 2=490-12703-1-ND
C68 C77: library part C0603-2µ2-16V-X7S-GRM188C71C225KE11, "Capacitor, Ceramic, 2.2µF 16V X7S 0603,±10%", Manufacturer=Murata, Manufacturer Part Number=GRM188C71C225KE11, Part number IPS=N.A., Part number NEMS=100200490, Supplier Part Number 1=81-GRM188C71C225KE1D, Artikkelnr Noca=N.A., Author=prbu, Component Class=Capacitors, Component Status=Active, ComponentLink1Description=Datasheet, ComponentLink1URL=https://www.murata.com/en-sg/products/productdetail?partno=GRM188C71C225KE11%23, ComponentLink2Description="Supplier link", ComponentLink2URL=https://www.mouser.com/ProductDetail/Murata-Electronics/GRM188C71C225KE11D?qs=ipkqEa07%2FjwigLKmkO4MzA%3D%3D, Footprint Doc=0603, HelpURL=N.A., LatestRevisionDate=2021-12-09, Note=16V, Pad Count=2, Part Number=C0603-2µ2-16V-X7S-GRM188C71C225KE11, Part number Norautron=N.A., PartId=100200490, Published=2021-12-09, Supplier 1=Mouser, Supplier 2=Digi-Key, Supplier Part Number 2=490-12731-1-ND
C71 C80: library part C0201-100n-16V-X7S-GRM033C71C104KE14, "Capacitor, Ceramic, 100nF 16V X7S 0201,±10%", Manufacturer=Murata, Manufacturer Part Number=GRM033C71C104KE14, Part number IPS=N.A., Part number NEMS=100200494, Supplier Part Number 1=81-GRM33C71C104KE14D, Artikkelnr Noca=N.A., Author=prbu, Component Class=Capacitors, Component Status=Active, ComponentLink1Description=Datasheet, ComponentLink1URL=https://www.murata.com/en-sg/products/productdetail?partno=GRM033C71C104KE14%23, ComponentLink2Description="Supplier link", ComponentLink2URL=https://www.mouser.com/ProductDetail/Murata-Electronics/GRM033C71C104KE14D?qs=P%2FC4Eoq9CDzkjc0H6wJP9A%3D%3D, Footprint Doc=0201, HelpURL=N.A., LatestRevisionDate=2021-12-09, Note=16V, Pad Count=2, Part Number=C0201-100n-16V-X7S-GRM033C71C104KE14, Part number Norautron=N.A., PartId=100200494, Published=2021-12-09, Supplier 1=Mouser, Supplier 2=Digi-Key, Supplier Part Number 2=490-10387-1-ND
C72: library part C0603-4µ7-6.3V-X7R, "Capacitor, X7R, ±10%, 6.3V", Manufacturer="Samsung Electro-Mechanics America", Manufacturer Part Number=CL10B475KQ8NQNC, Part number IPS=00000002541, Part number NEMS=100200350, Part number Norautron=N.A., Supplier Part Number 1=1276-2087-1-ND, Artikkelnr Noca=20039473, Author=rsk, Component Class=Capacitors, Component Status=Active, ComponentLink1Description=Datasheet, ComponentLink1URL=N.A., ComponentLink2Description="Supplier link", ComponentLink2URL=N.A., Footprint Doc=0603, HelpURL=http://media.digikey.com/pdf/Data%20Sheets/Samsung%20PDFs/CL10B475KQ8NQNC_Spec.pdf, LatestRevisionDate=2015-06-10, Note=6.3V, Pad Count=2, Part Number=C0603-4µ7-6.3V-X7R, PartId=100200350, Published=2015-06-10, Supplier 1=Digi-Key, Supplier 2=N.A., Supplier Part Number 2=N.A.
C75 C79: library part C0201-470n-6.3V-X5R-GRM033R60J474KE90, "Capacitor, Ceramic, 0.47µF 6.3V X5R 0201,±10%", Manufacturer=Murata, Manufacturer Part Number=GRM033R60J474KE90, Part number IPS=N.A., Part number NEMS=100200488, Supplier Part Number 1=490-10410-1-ND, Artikkelnr Noca=N.A., Author=prbu, Component Class=Capacitors, Component Status=Active, ComponentLink1Description=Datasheet, ComponentLink1URL=https://www.murata.com/en-sg/products/productdetail?partno=GRM033R60J474KE90%23, ComponentLink2Description="Supplier link", ComponentLink2URL=https://www.mouser.com/ProductDetail/Murata-Electronics/GRM033R60J474KE90D?qs=sGAEpiMZZMsKMBVpGK0sItoTn08PM719efpAd7qZWQ4%3D, Footprint Doc=0201, HelpURL=N.A., LatestRevisionDate=2021-12-09, Note=6.3V, Pad Count=2, Part Number=C0201-470n-6.3V-X5R-GRM033R60J474KE90, Part number Norautron=N.A., PartId=100200488, Published=2021-12-09, Supplier 1=Digi-Key, Supplier 2=Mouser, Supplier Part Number 2=81-GRM33R60J474KE90D
C76: library part C0201-10n-16V-X7R-GRM033R71C103KE14, "Capacitor, Ceramic, 10nF 16V X7R 0201,±10%", Manufacturer=Murata, Manufacturer Part Number=GRM033R71C103KE14, Part number IPS=N.A., Part number NEMS=100200491, Supplier Part Number 1=490-14453-1-ND, Artikkelnr Noca=N.A., Author=prbu, Component Class=Capacitors, Component Status=Active, ComponentLink1Description=Datasheet, ComponentLink1URL=https://www.murata.com/en-sg/products/productdetail?partno=GRM033R71C103KE14%23, ComponentLink2Description="Supplier link", ComponentLink2URL=https://www.mouser.com/ProductDetail/Murata-Electronics/GRM033R71C103KE14D?qs=QzBtWTOodeUmwPFZnw4Ogg%3D%3D, Footprint Doc=0201, HelpURL=N.A., LatestRevisionDate=2021-12-09, Note=16V, Pad Count=2, Part Number=C0201-10n-16V-X7R-GRM033R71C103KE14, Part number Norautron=N.A., PartId=100200491, Published=2021-12-09, Supplier 1=Digi-Key, Supplier 2=Mouser, Supplier Part Number 2=81-GRM033R71C103KE4D
C78 C81 C82 C83: library part C0603-4µ7-25V-X6S-GRM188C81E475KE11, "Capacitor, Ceramic, 4.7µF 25V X6S 0603,±10%", Manufacturer=Murata, Manufacturer Part Number=GRM188C81E475KE11, Part number IPS=N.A., Part number NEMS=100200486, Supplier Part Number 1=490-7199-1-ND, Artikkelnr Noca=N.A., Author=prbu, Component Class=Capacitors, Component Status=Active, ComponentLink1Description=Datasheet, ComponentLink1URL=https://www.murata.com/en-global/products/productdetail?partno=GRM188C81E475KE11%23, ComponentLink2Description="Supplier link", ComponentLink2URL=https://www.digikey.com/en/products/detail/murata-electronics/GRM188C81E475KE11D/3900424, Footprint Doc=0603, HelpURL=N.A., LatestRevisionDate=2021-12-09, Note=25V, Pad Count=2, Part Number=C0603-4µ7-25V-X6S-GRM188C81E475KE11, Part number Norautron=N.A., PartId=100200486, Published=2021-12-09, Supplier 1=Digi-Key, Supplier 2=Mouser, Supplier Part Number 2=81-GRM188C81E475KE1D
C84: library part C0201-22n-10V-X5R-GRM033R61A223KE84, "Capacitor, Ceramic, 22nF 10V X5R 0201,±10%", Manufacturer=Murata, Manufacturer Part Number=GRM033R61A223KE84, Part number IPS=N.A., Part number NEMS=100200495, Supplier Part Number 1=81-GRM033R61A223KE4E, Artikkelnr Noca=N.A., Author=prbu, Component Class=Capacitors, Component Status=Active, ComponentLink1Description=Datasheet, ComponentLink1URL=https://www.murata.com/en-sg/products/productdetail?partno=GRM033R61A223KE84%23, ComponentLink2Description="Supplier link", ComponentLink2URL=https://www.mouser.com/ProductDetail/Murata-Electronics/GRM033R61A223KE84E?qs=BZBei1rCqCCPqziwOnRusw%3D%3D, Footprint Doc=0201, HelpURL=N.A., LatestRevisionDate=2021-12-09, Note=10V, Pad Count=2, Part Number=C0201-22n-10V-X5R-GRM033R61A223KE84, Part number Norautron=N.A., PartId=100200495, Published=2021-12-09, Supplier 1=Mouser, Supplier 2=Digi-Key, Supplier Part Number 2=490-13334-1-ND
C85: library part C0201-220n-10V-X5R-GRM033R61A224KE90, "Capacitor, Ceramic, 0.22µF 10V X5R 0201, ±10%", Manufacturer=Murata, Manufacturer Part Number=GRM033R61A224KE90, Part number IPS=N.A., Part number NEMS=100200487, Supplier Part Number 1=81-GRM33R61A224KE90D, Artikkelnr Noca=N.A., Author=prbu, Component Class=Capacitors, Component Status=Active, ComponentLink1Description=Datasheet, ComponentLink1URL=https://www.murata.com/en-sg/products/productdetail?partno=GRM033R61A224KE90%23, ComponentLink2Description="Supplier link", ComponentLink2URL=https://www.mouser.com/ProductDetail/Murata-Electronics/GRM033R61A224KE90D?qs=sGAEpiMZZMtXHE36kCvv3zgoTDayw1zTTbet6g8ub%252Bg%3D, Footprint Doc=0201, HelpURL=N.A., LatestRevisionDate=2021-12-09, Note=10V, Pad Count=2, Part Number=C0201-220n-10V-X5R-GRM033R61A224KE90, Part number Norautron=N.A., PartId=100200487, Published=2021-12-09, Supplier 1=Mouser, Supplier 2=Mouser, Supplier Part Number 2=81-GRM033R61A224KE0J
C86: library part C0201-2µ2-10V-X5R-GRM033R61A225KE47, "Capacitor, Ceramic, 2.2µF 10V X5R 0201,±10%", Manufacturer=Murata, Manufacturer Part Number=GRM033R61A225KE47, Part number IPS=N.A., Part number NEMS=100200496, Supplier Part Number 1=81-GRM033R61A225KE7D, Artikkelnr Noca=N.A., Author=prbu, Component Class=Capacitors, Component Status=Active, ComponentLink1Description=Datasheet, ComponentLink1URL=https://www.murata.com/en-sg/products/productdetail?partno=GRM033R61A225KE47%23, ComponentLink2Description="Supplier link", ComponentLink2URL=https://www.mouser.com/ProductDetail/Murata-Electronics/GRM033R61A225KE47D?qs=I53XXhTNm8tqgHaFsI1bug%3D%3D, Footprint Doc=0201, HelpURL=N.A., LatestRevisionDate=2021-12-09, Note=10V, Pad Count=2, Part Number=C0201-2µ2-10V-X5R-GRM033R61A225KE47, Part number Norautron=N.A., PartId=100200496, Published=2021-12-09, Supplier 1=Mouser, Supplier 2=Digi-Key, Supplier Part Number 2=490-GRM033R61A225KE47JCT-ND
C87: library part C0402-1µ0-10V-X7S-GRM155C71A105KE11, "Capacitor, Ceramic, 1.0µF 10V X7S 0402,±10%", Manufacturer=Murata, Manufacturer Part Number=GRM155C71A105KE11, Part number IPS=N.A., Part number NEMS=100200497, Supplier Part Number 1=81-GRM155C71A105KE1J, Artikkelnr Noca=N.A., Author=prbu, Component Class=Capacitors, Component Status=Active, ComponentLink1Description=Datasheet, ComponentLink1URL=https://www.murata.com/en-sg/products/productdetail?partno=GRM155C71A105KE11%23, ComponentLink2Description="Supplier link", ComponentLink2URL=https://www.digikey.com/en/products/detail/murata-electronics/GRM155C71A105KE11D/6606086, Footprint Doc=0402, HelpURL=N.A., LatestRevisionDate=2021-12-09, Note=10V, Pad Count=2, Part Number=C0402-1µ0-10V-X7S-GRM155C71A105KE11, Part number Norautron=N.A., PartId=100200497, Published=2021-12-09, Supplier 1=Mouser, Supplier 2=Digi-Key, Supplier Part Number 2=490-14457-1-ND
C88: library part C0402-1µ0-35V-X5R-GRM155R6YA105KE11, "Capacitor, Ceramic, 1.0µF 35V X5R 0402,±10%", Manufacturer=Murata, Manufacturer Part Number=GRM155R6YA105KE11, Part number IPS=N.A., Part number NEMS=100200489, Supplier Part Number 1=81-GRM155R6YA105KE1D, Artikkelnr Noca=N.A., Author=prbu, Component Class=Capacitors, Component Status=Active, ComponentLink1Description=Datasheet, ComponentLink1URL=https://www.murata.com/en-sg/products/productdetail?partno=GRM155R6YA105KE11%23, ComponentLink2Description="Supplier link", ComponentLink2URL=https://www.digikey.com/en/products/detail/murata-electronics/GRM155R6YA105KE11D/4905162, Footprint Doc=0402, HelpURL=N.A., LatestRevisionDate=2021-12-09, Note=35V, Pad Count=2, Part Number=C0402-1µ0-35V-X5R-GRM155R6YA105KE11, Part number Norautron=N.A., PartId=100200489, Published=2021-12-09, Supplier 1=Mouser, Supplier 2=Digi-Key, Supplier Part Number 2=490-10019-1-ND
C91: library part C0201-0.5p, "Capacitor, NP0, ±0.05pF", Manufacturer=N.A., Part number NEMS=100200008, Artikkelnr Noca=N.A., Author=rsk, Component Class=Capacitors, Component Status=Active, ComponentLink1Description=Datasheet, ComponentLink1URL=N.A., ComponentLink2Description="Supplier link", ComponentLink2URL=N.A., Footprint Doc=0201, HelpURL=N.A., LatestRevisionDate=2018-10-22, Manufacturer Part Number=N.A., Note=50V, Pad Count=2, Part Number=C0201-0.5p, Part number IPS=N.A., Part number Norautron=N.A., PartId=100200008, Published=2014-11-13, Supplier 1=N.A., Supplier 2=N.A., Supplier Part Number 1=N.A., Supplier Part Number 2=N.A.
D1 D2: "Ultra low capacitance double rail-to-rail ESD protection diode", Manufacturer="NXP Semiconductors", Part number IPS=00000009951, Part number NEMS=101300082, Part number Norautron=26313940, Supplier Part Number 1=568-4140-1-ND, Artikkelnr Noca=10069015, Author=rsk, Component Class=Semiconductors, Component Status=Active, ComponentLink1Description=Datasheet, ComponentLink1URL=N.A., ComponentLink2Description="Supplier link", ComponentLink2URL=N.A., Footprint Doc=SOT-143B, HelpURL=http://www.farnell.com/datasheets/109718.pdf, LatestRevisionDate=2017-11-09, Manufacturer Part Number=PRTR5V0U2X, Note=N.A., Pad Count=4, Part Number=PRTR5V0U2X, PartId=101300082, Published=2012-06-11, Supplier 1=Digi-Key, Supplier 2=Farnell, Supplier Part Number 2=152-4157
D3 D4 D5 D6 D7 D8: "20V schottky barrier diode, Vf 350 mV @ 100 mA, Ir 2.0 µA @ 10 V, If 500 mA", Manufacturer="ON Semiconductor", Part number IPS=00000009952, Part number NEMS=101300131, Part number Norautron=26311081, Supplier Part Number 1=NSR0620P2T5GOSCT-ND, Artikkelnr Noca=10029169, Author=rsk, Component Class=Semiconductors, Component Status=Active, ComponentLink1Description=Datasheet, ComponentLink1URL=N.A., ComponentLink2Description="Supplier link", ComponentLink2URL=N.A., Footprint Doc=SOD-923, HelpURL=http://www.onsemi.com/pub_link/Collateral/NSR0620P2-D.PDF, LatestRevisionDate=2016-07-07, Manufacturer Part Number=NSR0620P2T5G, Note=N.A., Pad Count=2, Part Number=NSR0620P2T5G, PartId=101300131, Published=2016-07-07, Supplier 1=Digi-Key, Supplier 2=N.A., Supplier Part Number 2=N.A.
FB1 FB2 FB3 FB4 FB5 FB6: library part FB0402-120R@100M-500mA, "Ferrite Bead, 120 Ohm @ 100MHz, 500mA, 250 mOhm Max", Manufacturer=Murata, Manufacturer Part Number=BLM15AG121SN1D, Part number IPS=00000009954, Part number NEMS=100300099, Part number Norautron=265230631, Supplier Part Number 1=490-1005-1-ND, Artikkelnr Noca=33029317, Author=rsk, Component Class=Inductors, Component Status=Active, ComponentLink1Description=Datasheet, ComponentLink1URL=N.A., ComponentLink2Description="Supplier link", ComponentLink2URL=N.A., Footprint Doc=0402, HelpURL=http://search.murata.co.jp/Ceramy/image/img/PDF/ENG/L0110S0100BLM15A_SN.pdf, LatestRevisionDate=2014-01-10, Note="Chip EMIFIL Inductor Type Chip Ferrite Bead", Pad Count=2, Part Number=FB0402-120R@100M-500mA, PartId=100300099, Published=2011-11-14, Supplier 1=Digi-Key, Supplier 2=Farnell, Supplier Part Number 2=151-5760
Fid1 Fid2: library part Fid-Mark, "Fiducial Mark", Manufacturer=N.A., Part number NEMS=100500073, Artikkelnr Noca=N.A., Author=rsk, Component Class=Connectors, Component Status=Active, ComponentLink1Description=Datasheet, ComponentLink1URL=N.A., ComponentLink2Description="Supplier link", ComponentLink2URL=N.A., Footprint Doc=Fiducial, HelpURL=N.A., LatestRevisionDate=2009-12-12, Manufacturer Part Number=N.A., Note=N.A., Pad Count=1, Part Number=Fid-Mark, Part number IPS=N.A., Part number Norautron=N.A., PartId=100500073, Published=2009-12-12, Supplier 1=N.A., Supplier 2=N.A., Supplier Part Number 1=N.A., Supplier Part Number 2=N.A.
J1 J7: "Coaxial Connector with Switch", Manufacturer=Murata, Part number IPS=00000009955, Part number NEMS=100500400, Part number Norautron=26030338, Supplier Part Number 1=490-4981-1-ND, Artikkelnr Noca=55029011, Author=rsk, Component Class=Connectors, Component Status=Active, ComponentLink1Description=Datasheet, ComponentLink1URL=N.A., ComponentLink2Description="Supplier link", ComponentLink2URL=N.A., Footprint Doc=COAXIAL-SWF, HelpURL=http://www.murata.com/products/catalog/pdf/o33e.pdf, LatestRevisionDate=2014-04-24, Manufacturer Part Number=MM8130-2600, Note=N.A., Pad Count=3, Part Number=MM8130-2600, PartId=100500400, Published=2014-04-24, Supplier 1=Digi-Key, Supplier 2=Mouser, Supplier Part Number 2=81-MM8130-2600RA2
J2 J3: library part USB-Micro-B-RA-SMD-PiP, "MicroUSB-B-SMT", Manufacturer="Allen Creations Corp.", Manufacturer Part Number=AJU55-BS2111-L, Part number IPS=00000007790, Part number NEMS=100500490, Part number Norautron=N.A., Artikkelnr Noca=55029020, Author=rsk, Component Class=Connectors, Component Status=Active, ComponentLink1Description=Datasheet, ComponentLink1URL=N.A., ComponentLink2Description="Supplier link", ComponentLink2URL=N.A., Footprint Doc=USB-Micro-B-RA-SMD-PiP, HelpURL="\\hizz\pro\app9717\Datasheet\connectors\Allen Creations Corp\AJU-211.pdf", LatestRevisionDate=2016-04-21, Note=N.A., Pad Count=5, Part Number=USB-Micro-B-RA-SMD-PiP, PartId=100500490, Published=2014-10-07, Supplier 1=Cabcon, Supplier 2=Digi-Key, Supplier Part Number 1=AJU55-BS2111-L, Supplier Part Number 2=609-4616-1-ND
J4: library part TC2050-IDC-NLFP, "CBL PLUG-OF-NAILS 10-PIN", Manufacturer="Tag-Connect LLC", Part number IPS=N.A., Part number NEMS=100500463, Supplier Part Number 1=TC2050-IDC-NL-ND, Artikkelnr Noca=N.A., Author=rsk, Component Class=Connectors, Component Status=Active, ComponentLink1Description=Datasheet, ComponentLink1URL=N.A., ComponentLink2Description="Supplier link", ComponentLink2URL=N.A., Footprint Doc=TC2050-IDC-NLFP, HelpURL=http://www.tag-connect.com/Materials/TC2050-IDC%20Datasheet.pdf, LatestRevisionDate=2012-11-21, Manufacturer Part Number=TC2050-IDC-NLFP, Note=N.A., Pad Count=10, Part Number=TC2050-IDC-NLFP, Part number Norautron=N.A., PartId=100500463, Published=2012-11-21, Supplier 1=Digi-Key, Supplier 2=N.A., Supplier Part Number 2=N.A.
J5: library part FPC_05P-0.5mm-RA-SMD, "0.5mm FPC, 5P,Right Angle SMT,Double Contact,H=1.2mm,White, Tin plated", Manufacturer=W-CON, Manufacturer Part Number=5141-05RZDNWR02, Part number IPS=00000007792, Part number NEMS=100500528, Part number Norautron=26032377, Artikkelnr Noca=55010020, Author=rsk, Component Class=Connectors, Component Status=Active, ComponentLink1Description=Datasheet, ComponentLink1URL=N.A., ComponentLink2Description="Supplier link", ComponentLink2URL=N.A., Footprint Doc=FPC_05P-0.5mm-RA-SMD, HelpURL=\\hizz\pro\app9717\Datasheet\connectors\W-CON\5141-05RZDNXX02.pdf, LatestRevisionDate=2021-09-24, Note=N.A., Pad Count=7, Part Number=FPC_05P-0.5mm-RA-SMD, PartId=100500528, Published=2015-06-22, Supplier 1=Cabcon, Supplier 2=Digi-Key, Supplier Part Number 1=5141-05RZDNWR02, Supplier Part Number 2=WM9836CT-ND